# Altium PCB STM32F4xx.PcbDoc
Units mil, origin at the board's own origin, x right, y up, seen from the top; angles counter-clockwise.
Board outline 1112.41 x 2500 mil, 4 copper layers (Top Layer, Ground Layer, Power Layer, Bottom Layer), stack 62.631 mil thick; 47 components, 31 nets, 206 pads, 61 vias.
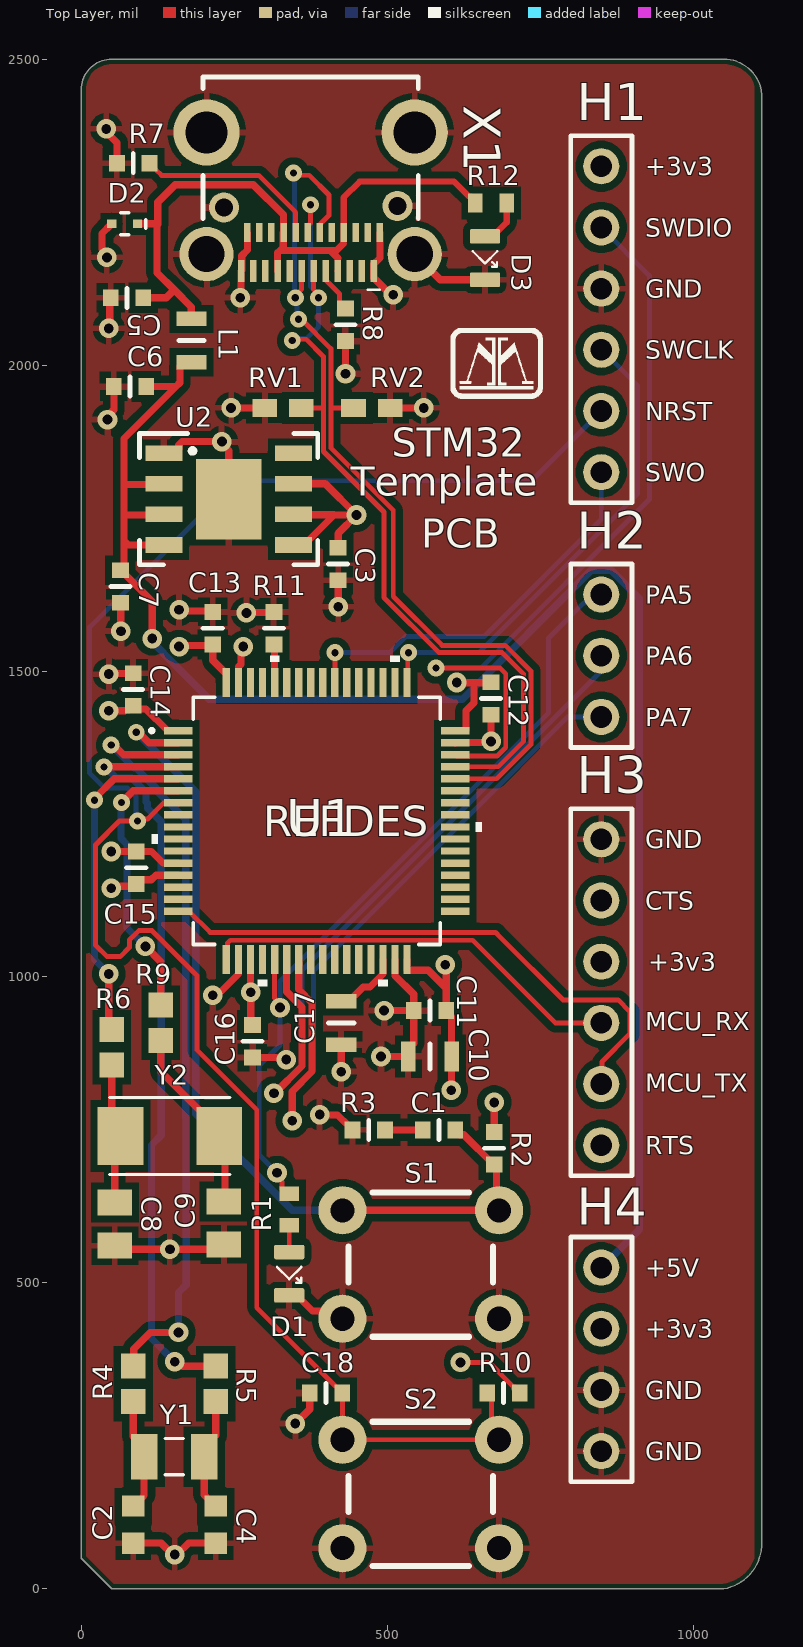
[diagram p0: Top Layer view]
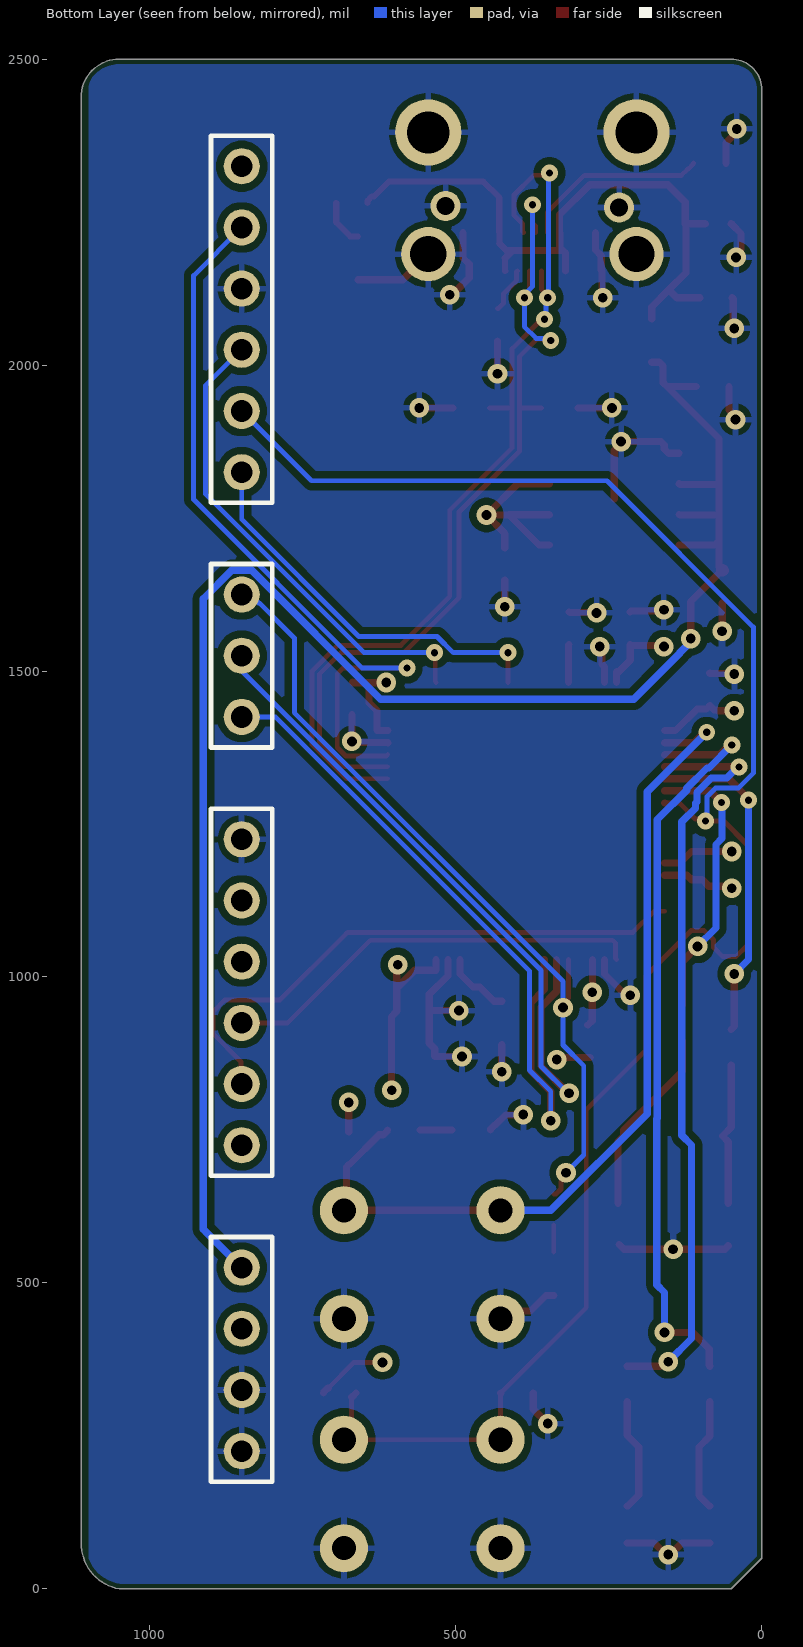
[diagram p1: Bottom Layer view, seen from below]
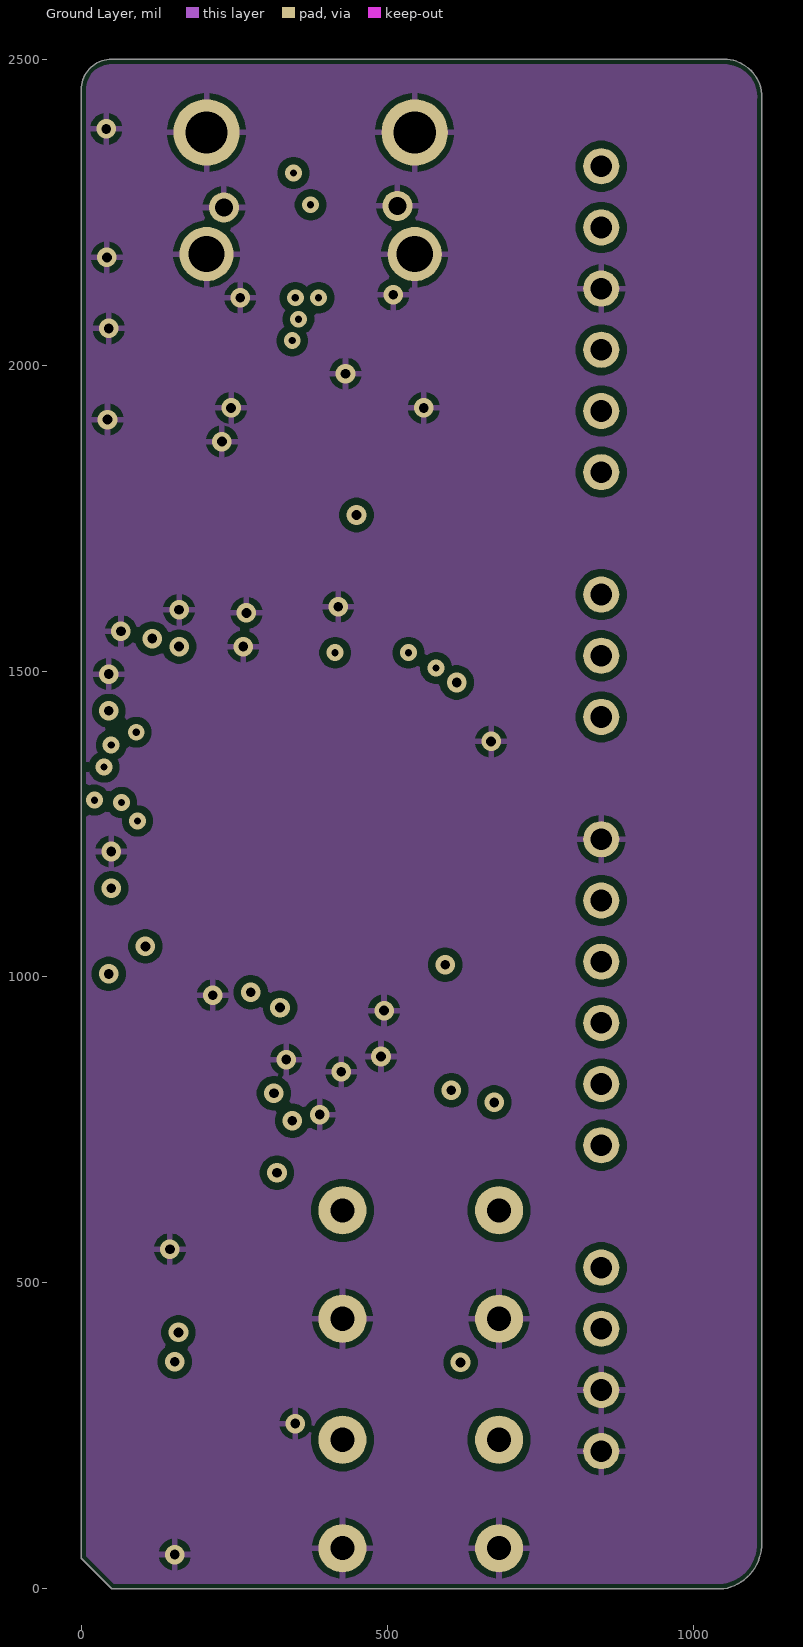
[diagram p2: Ground Layer]
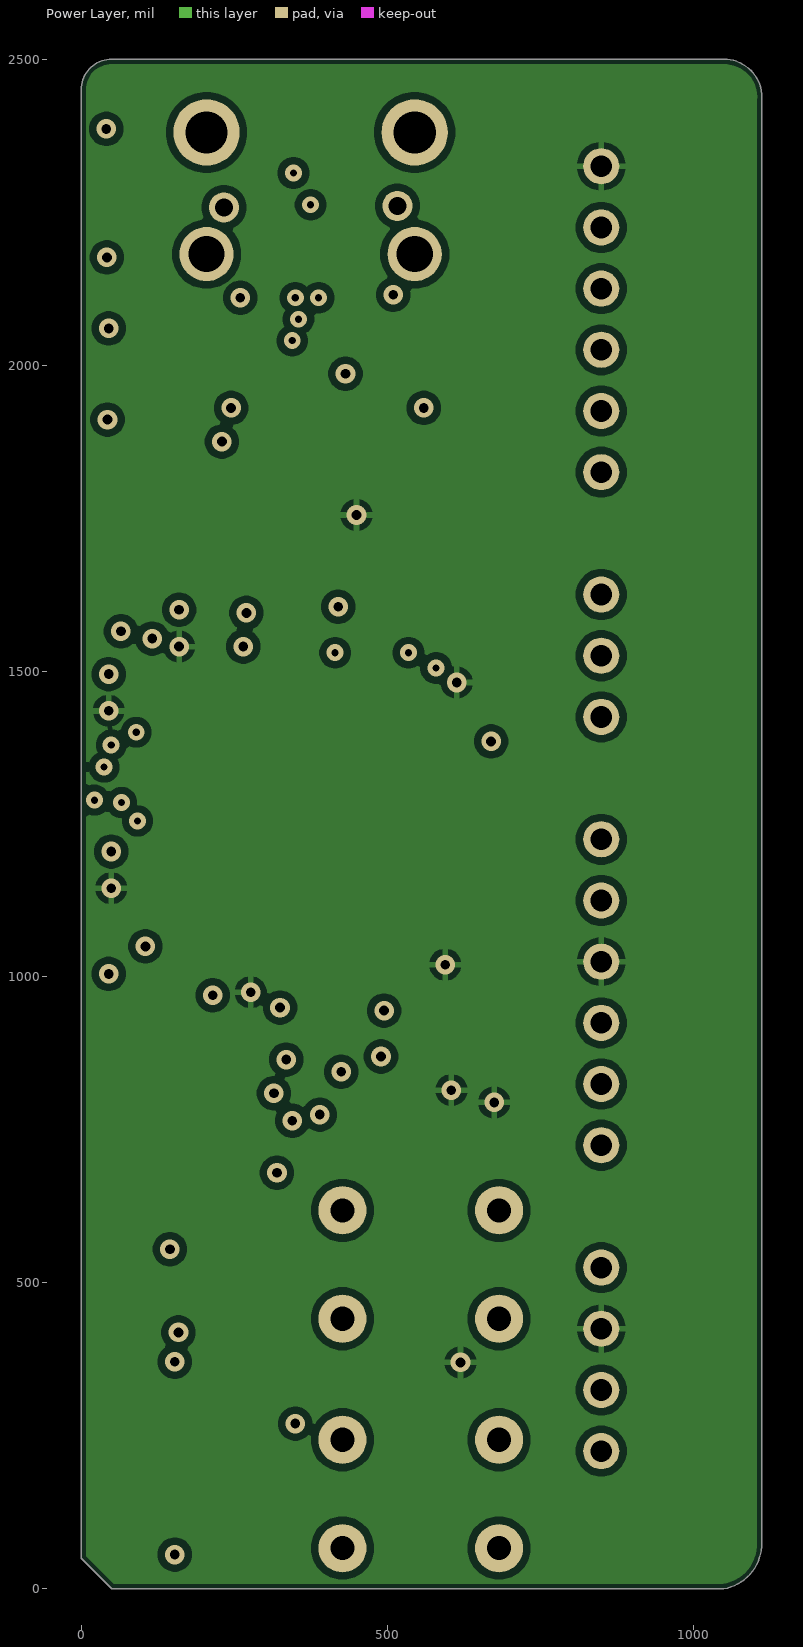
[diagram p3: Power Layer]
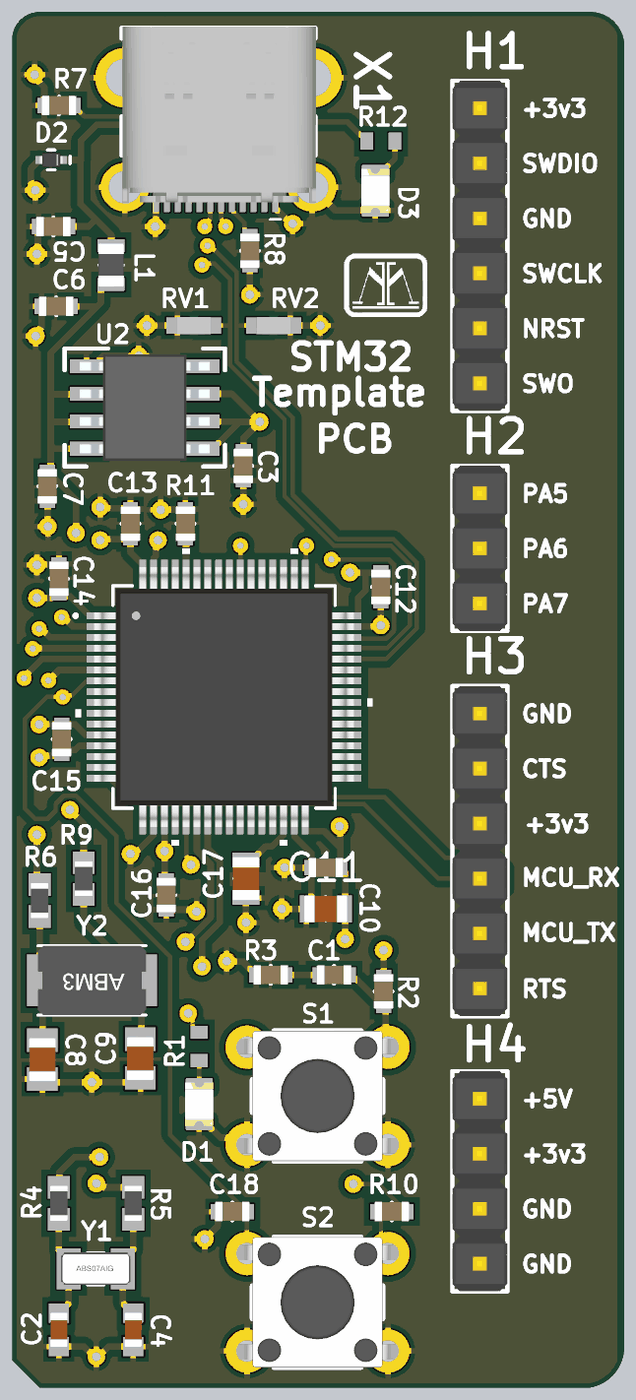
[diagram p4: 3D render of the assembled board from above, using the file's embedded part models]

## Layer stack, top to bottom
Top Solder: solder mask 0.4, Solder Resist, Dk 3.8
Top Layer: signal copper 1.378
Dielectric 2: prepreg 8.2839, 7628*1, Dk 4.4
Ground Layer: signal copper 0.689
Dielectric 1: dielectric 41.9291, FR-4, Dk 4.8
Power Layer: signal copper 0.689
Dielectric 3: prepreg 8.2839, 7628*1, Dk 4.4
Bottom Layer: signal copper 1.378
Bottom Solder: solder mask 0.4, Solder Resist, Dk 3.8

## Board outline
0,50 50,0 1050,0 ccw(c1037.51,73.72) 1112.27,75 1112.27,2432.22 ccw(c1050.06,2437.56) 1050,2500 50,2500 ccw(c50,2450) 0,2450

## Design rules (kind name [scope] priority, off if disabled: settings)
BoardOutlineClearance [All] p1: gap=7.87 ignorepadtopadclearanceinfootprint=FALSE
Clearance "inPolygon Clearance" [InPolygon] p1: gap=11.81 ignorepadtopadclearanceinfootprint=TRUE // this rule ensures that every net within a polygon of a different net has a set clearance from the poly
Clearance "Different Diff Pair" [All] p2: gap=7.87 ignorepadtopadclearanceinfootprint=TRUE
Clearance "Same Diff Pair" [All] p3: gap=3.94 ignorepadtopadclearanceinfootprint=TRUE
Clearance "Different Nets" [not InAnyDifferentialPair] p4: gap=11.81 ignorepadtopadclearanceinfootprint=TRUE except(3.94: Arc-SMDPad Arc-THPad Arc-Via Arc-Text Track-SMDPad Track-THPad Track-Via Track-Text SMDPad-Text THPad-Text Via-Text Fill-Text Poly-Text Region-Text Text-Text; 4.72: Arc-Arc Arc-Track Track-Track; 5.91: SMDPad-SMDPad SMDPad-THPad SMDPad-Via THPad-THPad THPad-Via Via-Via; 7.87: Arc-Hole Track-Hole SMDPad-Hole THPad-Hole Via-Hole Fill-Hole Poly-Hole Region-Hole Text-Hole)
Clearance "Same Net" [not InAnyDifferentialPair] p5: gap=0 ignorepadtopadclearanceinfootprint=TRUE except(3.94: THPad-Via; 7.09: Arc-Arc Arc-Track Track-Track)
ComponentClearance [All] p1: gap=4 collisioncheckmode=3 verticalgap=4 showdistances=TRUE
DiffPairsRouting "Ethernet Routing" [InDifferentialPairClass('Ethernet_Pairs')] p1: maxlimit=9.84 minlimit=7.87 mostfreqgap=9.84 toplayer_maxgap=7.87 toplayer_prefgap=7.87 toplayer_minwidth=9.84 toplayer_maxwidth=9.84 toplayer_prefwidth=9.84 midlayer1_mingap=9.84 midlayer1_minwidth=7.48 midlayer1_maxwidth=7.48 midlayer1_prefwidth=7.48 midlayer2_mingap=9.84 midlayer2_minwidth=7.48 midlayer2_maxwidth=7.48 midlayer2_prefwidth=7.48 bottomlayer_maxgap=7.87 bottomlayer_prefgap=7.87 bottomlayer_minwidth=9.84 bottomlayer_maxwidth=9.84 bottomlayer_prefwidth=9.84 impedanceprofiledriven=TRUE maxuncoupledlength=500
DiffPairsRouting "USB Routing" [InDifferentialPairClass('USB_Pairs')] p2: maxlimit=11.45 minlimit=4.99 mostfreqgap=11.45 toplayer_maxgap=4.99 toplayer_prefgap=4.99 toplayer_minwidth=9.07 toplayer_maxwidth=9.07 toplayer_prefwidth=9.07 midlayer1_mingap=11.45 midlayer1_minwidth=9.84 midlayer1_maxwidth=9.84 midlayer1_prefwidth=9.84 midlayer2_mingap=11.45 midlayer2_minwidth=9.84 midlayer2_maxwidth=9.84 midlayer2_prefwidth=9.84 bottomlayer_maxgap=4.99 bottomlayer_prefgap=4.99 bottomlayer_minwidth=9.07 bottomlayer_maxwidth=9.07 bottomlayer_prefwidth=9.07 impedanceprofiledriven=TRUE maxuncoupledlength=500
DiffPairsRouting "CAN Routing" [InDifferentialPairClass('CAN_Pairs')] p3: maxlimit=35.69 minlimit=19.68 mostfreqgap=35.69 toplayer_maxgap=19.68 toplayer_prefgap=19.68 toplayer_minwidth=7.93 toplayer_maxwidth=7.93 toplayer_prefwidth=7.93 midlayer1_mingap=35.69 midlayer1_minwidth=6.1 midlayer1_maxwidth=6.1 midlayer1_prefwidth=6.1 midlayer2_mingap=35.69 midlayer2_minwidth=6.1 midlayer2_maxwidth=6.1 midlayer2_prefwidth=6.1 bottomlayer_maxgap=19.68 bottomlayer_prefgap=19.68 bottomlayer_minwidth=7.93 bottomlayer_maxwidth=7.93 bottomlayer_prefwidth=7.93 impedanceprofiledriven=TRUE maxuncoupledlength=500
Height [All] p1: minheight=0 maxheight=71497.94 prefheight=500
HoleSize [All] p1: absolutevalues=TRUE maxlimit=248.03 minlimit=11.81 maxpercent=80.000 minpercent=20.000
HoleToHoleClearance [All] p1: gap=9.84 allowstackedmicrovias=FALSE
Length [All] p1: maxlimit=1709.92 minlimit=0 usedelayunits=TRUE mindelay=0.000000 maxdelay=10000.000000
MatchedLengths "Diff Pair Matched Delays" [InDifferentialPairClass('Ethernet_Pairs') or InDifferentialPairClass('USB_Pairs') or InDifferentialPairClass('CAN_Pairs')] p1: tolerance=196.85 checknetsindiffpair=TRUE checkdiffpairvsdiffpair=FALSE checkxsignals=FALSE checkothers=FALSE usedelayunits=TRUE delaytolerance=100.000000
MinimumAnnularRing [All] p1: minimumring=7.87
MinimumSolderMaskSliver [All] p1: minsoldermaskwidth=0
PlaneClearance "Supply Net Clearance" [InNetClass('Supply_Nets')] p1: clearance=19.68
PlaneClearance "All Nets" [All] p2: clearance=11.81
PolygonConnect "Supply Nets" [InNetClass('Supply_Nets')] p1: connectstyle=Direct reliefconductorwidth=11.81 reliefentries=4 polygonreliefangle="90 Angle" airgapwidth=10
PolygonConnect General [All] p2: connectstyle=Relief reliefconductorwidth=10 reliefentries=4 polygonreliefangle="90 Angle" airgapwidth=10
RoutingVias [All] p1: holewidth=7.87 width=13.78 viastyle="Through Hole" minholewidth=5.91 minwidth=11.81 maxholewidth=248.03 maxwidth=257.87
SilkToSilkClearance [All] p1: silktosilkclearance=0
SilkToSolderMaskClearance [All] p1: minsilkscreentomaskgap=0 clearancetoexposedcopper=TRUE
SolderMaskExpansion [All] p1: expansion=2.95 istentingtop=FALSE
SupplyNets "Schematic Supply Nets_4" [InNet('+VUSB')] p1: voltage=0.000
SupplyNets "Schematic Supply Nets_2" [InNet('+5')] p2: voltage=0.000
SupplyNets "Schematic Supply Nets" [InNet('+3v3')] p3: voltage=0.000
SupplyNets "Schematic Supply Nets_3" [InNet('GND')] p4: voltage=0.000
UnRoutedNet [All] p1: checkbadconnections=TRUE
ViasUnderSMD [All] p1: allowed=TRUE
Width "nRF Width" [InNetClass('nRF Signal')] p1: maxlimit=14.94 minlimit=10.37 preferedwidth=14.94 toplayer_minwidth=14.94 midlayer1_maxwidth=10.37 midlayer1_prefwidth=10.37 midlayer2_maxwidth=10.37 midlayer2_prefwidth=10.37 bottomlayer_minwidth=14.94 impedanceprofiledriven=TRUE impedanceprofileid={A3B527BC-29A3-460A-A085-F9127CF7B707} impedanceprofilevalue=50.000000 minimp=50.000000 maximp=50.000000 favimp=50.000000 checkconnectedcopper=TRUE
Width [All] p2: maxlimit=3937.01 minlimit=3.94 preferedwidth=11.81
20 further rules are at their usual default settings.

## Classes and differential pairs
differential pair class DIFF_USB: USB_D
differential pair USB_D: +USB_D_P -USB_D_N

## Components (designator, comment, footprint, x,y, rotation, side; value= is the part's Value field where it differs from the comment)
C1 "[Cap] 0603 0.1uF 10% 16V" "[Cap] SMD 0603" 585,750 r0 top
C2 "8pF" "[Cap] 0603 8pF ±0.1pF 50V" 85,105 r270 top
C3 "[Cap] 0603 10uF 10% 10V" "[Cap] SMD 0603" 420,1675 r270 top
C4 "8pF" "[Cap] 0603 8pF ±0.1pF 50V" 220,105 r270 top
C5 "[Cap] 0603 0.1uF 10% 16V" "[Cap] SMD 0603" 75,2110 r180 top
C6 "[Cap] 0603 0.1uF 10% 16V" "[Cap] SMD 0603" 80,1965 r180 top
C7 "[Cap] 0603 10uF 10% 10V" "[Cap] SMD 0603" 64,1638 r90 top
C8 "[Cap] 0805 18pF ±5% 250V" "[Cap] 0805 ±5% 250V" 55,596 r270 top
C9 "[Cap] 0805 18pF ±5% 250V" "[Cap] 0805 ±5% 250V" 233,598 r270 top
C10 "[Cap] 0805 4.7uF 10% 50V" "[Cap] SMD 0805" 570,870 r0 top
C11 "[Cap] 0603 0.1uF 10% 16V" "[Cap] SMD 0603" 570,945 r0 top
C12 "[Cap] 0603 0.1uF 10% 16V" "[Cap] SMD 0603" 670,1455 r270 top
C13 "[Cap] 0603 0.1uF 10% 16V" "[Cap] SMD 0603" 215,1570 r90 top
C14 "[Cap] 0603 0.1uF 10% 16V" "[Cap] SMD 0603" 85,1470 r90 top
C15 "[Cap] 0603 0.1uF 10% 16V" "[Cap] SMD 0603" 90,1178.43 r90 top
C16 "[Cap] 0603 0.1uF 10% 16V" "[Cap] SMD 0603" 280,895 r90 top
C17 "[Cap] 0805 4.7uF 10% 50V" "[Cap] SMD 0805" 425,925 r90 top
C18 "[Cap] 0603 0.1uF 10% 16V" "[Cap] SMD 0603" 400,320 r180 top
D1 "[LED] SMD 0805 Green" "[LED] SMD 0805" 340,515 r270 top
D2 "Cathode side marked by line" "[TVS] UNIDIRECTIONAL FOR 5V ESD" 71,2231 r180 top
D3 "[LED] SMD 0805 Red" "[LED] SMD 0805" 660,2175 r270 top
H1 "SWD Header" "[Header] 1x6 Male STM32 SWD" 850,2075 r270 top
H2 "GPIO Header" "[Header] 1x3 Male GPIO" 849.99,1525 r270 top
H3 "UART Header" "[Header] 1x6 Male STM32 UART" 850,975 r270 top
H4 "1x4 Header" "[Header] 1x4 Male Power" 849.99,375 r270 top
L1 "652-MH2029-300Y" "[Ferrite] SMD 0805" 180,2040 r270 top
R1 "RC0603JR-13470RL" RESC1608X55X25LL10T15 340,620 r270 top
R2 "[10k] SMD 0603 1% 1/8W" "[Res] SMD 0603" 675,720 r270 top
R3 "[100] SMD 0603 1% 1/10W" "[Res] SMD 0603" 470,750 r0 top
R4 "[0] SMD 0603 5% 1/10W" "[0] SMD 0603 5% 1/10W" 85,335 r270 top
R5 "[0] SMD 0603 5% 1/10W" "[0] SMD 0603 5% 1/10W" 220,335 r270 top
R6 "[0] SMD 0603 5% 1/10W" "[0] SMD 0603 5% 1/10W" 50,885 r270 top
R7 "[5.1k] SMD 0603 1% 1/10W" "[Res] SMD 0603" 85,2330 r180 top
R8 "[5.1k] SMD 0603 1% 1/10W" "[Res] SMD 0603" 432,2066 r270 top
R9 "[0] SMD 0603 5% 1/10W" "[0] SMD 0603 5% 1/10W" 130,925 r270 top
R10 "[10k] SMD 0603 1% 1/8W" "[Res] SMD 0603" 690,320 r0 top
R11 "[10k] SMD 0603 1% 1/8W" "[Res] SMD 0603" 315,1570 r90 top
R12 "RC0603JR-13470RL" RESC1608X55X25LL10T15 670,2265 r0 top
RV1 "[ESD] SMD Varistor for USB 3.3V lines" "[ESD] SMD Varistor for USB 3.3V lines" 330,1930 r180 top
RV2 "[ESD] SMD Varistor for USB 3.3V lines" "[ESD] SMD Varistor for USB 3.3V lines" 475,1930 r0 top
S1 "Standard pushbutton" "[SPST] Pushbutton" 555,530 r180 top
S2 "Standard pushbutton" "[SPST] Pushbutton" 555,155 r0 top
U1 "STM32F446RET6" STM32F446RET6 385,1255 r0 top
U2 "3V3 1.5A" "[Linear] 3V3 1.5A" 241,1781 r0 top
X1 "USB-C" "[USB] USB-C Right-Angle" 375,2310 r180 top
Y1 "ABS07-32.768KHZ" ABS07-32.768KHZ 152,216 r0 top
Y2 "ABM3-8.000MHZ" ABM3-8.000MHZ 145,740 r180 top

## Footprints (in the part's own frame and the unit in brackets; to place one, negate y for a bottom-side part, rotate by r counter-clockwise, add the part's x,y. Pads: shape width x height; smd on the part's side, far side on the other; paste and mask are expansions set on the pad)
"[0] SMD 0603 5% 1/10W" [mm]
  rect 1.04x1.02 smd: 1(-0.735,0) 2(0.735,0)
  body extent -0.8,-0.4 0.8,0.4, height 0.55
"[Cap] 0603 8pF ±0.1pF 50V" [mm]
  rect 0.89x0.93 smd paste+0 mask+0.102: 1(-0.77,0) 2(0.77,0)
  body extent -0.8,-0.4 0.8,0.4, height 0.9
"[Cap] 0805 ±5% 250V" [mm]
  rect 1.08x1.42 smd paste+0 mask+0.102: 1(-0.895,0) 2(0.895,0)
  body extent -1,-0.63 1,0.63, height 1
"[Cap] SMD 0603" [mm]
  rect 0.65x0.7 smd: 1(-0.675,0) 2(0.675,0)
  silkscreen extent 0,-0.4 0,0.4, body extent -0.8,-0.45 0.8,0.45, height 0.8
"[Cap] SMD 0805" [mm]
  rect 0.6x1.25 smd: 1(-0.9,0) 2(0.9,0)
  silkscreen extent 0,-0.53 0,0.53, body extent -1,-0.63 1,0.63, height 1
"[ESD] SMD Varistor for USB 3.3V lines" [mm]
  rect 1.02x0.76 smd: 1(-0.76,0) 2(0.76,0)
  body extent -0.8,-0.4 0.8,0.4, height 0.45
"[Ferrite] SMD 0805" [mm]
  rect 0.6x1.25 smd: 1(-0.9,0) 2(0.9,0)
  silkscreen extent 0,-0.53 0,0.53, body extent -1,-0.6 1,0.6, height 1.1
"[Header] 1x3 Male GPIO" [mm]
  round 1.5 hole 0.9: 1(-2.54,0) 2(0,0) 3(2.54,0)
  silkscreen extent -3.81,-1.27 3.81,1.27, body extent -3.81,-1.27 3.81,1.27, height 9.5
"[Header] 1x4 Male Power" [mm] "2.54mm pitch"
  round 1.5 hole 0.9: 1(-3.81,0) 2(-1.27,0) 3(1.27,0) 4(3.81,0)
  silkscreen extent -5.08,-1.27 5.08,1.27, body extent -5.08,-1.27 5.08,1.27, height 9.5
"[Header] 1x6 Male STM32 SWD" [mm]
  round 1.5 hole 0.9: 1(-6.35,0) 2(-3.81,0) 3(-1.27,0) 4(1.27,0) 5(3.81,0) 6(6.35,0)
  silkscreen extent -7.62,-1.27 7.62,1.27, body extent -7.62,-1.27 7.62,1.27, height 9.5
"[Header] 1x6 Male STM32 UART" [mm]
  round 1.5 hole 0.9: 1(-6.35,0) 2(-3.81,0) 3(-1.27,0) 4(1.27,0) 5(3.81,0) 6(6.35,0)
  silkscreen extent -7.62,-1.27 7.62,1.27, body extent -7.62,-1.27 7.62,1.27, height 9.5
"[LED] SMD 0805" [mm]
  rrect20% 0.6x1.25 smd: 1(-0.9,0) 2(0.9,0)
  silkscreen extent -0.28,-0.51 0.37,0.51, body extent -1,-0.65 1,0.65, height 0.8
"[Linear] 3V3 1.5A" [mm]
  rect 1.525x0.65 smd: 1(-2.688,1.905) 2(-2.688,0.635) 3(-2.688,-0.635) 4(-2.688,-1.905) 5(2.688,-1.905) 6(2.688,-0.635) 7(2.688,0.635) 8(2.688,1.905)
  rect 2.71x3.35 smd: 9(0,0)
  silkscreen extent -3.7,-2.73 3.7,2.73, body extent -3,-2.45 3,2.45, height 1.5
"[Res] SMD 0603" [mm]
  rect 0.65x0.7 smd: 1(-0.675,0) 2(0.675,0)
  silkscreen extent 0,-0.4 0,0.4, body extent -0.8,-0.45 0.8,0.45, height 0.8
"[SPST] Pushbutton" [mm] "(Regular pushbutton)"
  round 2 hole 1: 1(-3.25,2.25) 1(3.25,2.25) 2(-3.25,-2.25) 2(3.25,-2.25)
  silkscreen extent -3,-3 3,3, body extent -3.85,-3 3.85,3, height 4.95
"[TVS] UNIDIRECTIONAL FOR 5V ESD" [mil]
  rect 15x14 smd paste+0 mask+0: 1(-21.17,0) 2(21.17,0)
  silkscreen extent -34,-18 7,18, body extent -21,-13 21,13, height 16
"[USB] USB-C Right-Angle" [mm]
  rect 0.27x0.9 smd: A1(-2.625,3.965) A2(-2.125,3.965) A3(-1.625,3.965) A4(-1.125,3.965) A5(-0.625,3.965) A6(-0.125,3.965) A7(0.375,3.965) A8(0.875,3.965) A9(1.375,3.965) A10(1.875,3.965) A11(2.375,3.965) A12(2.875,3.965)
  rect 0.27x0.8 smd: B1(2.625,2.365) B2(2.125,2.365) B3(1.625,2.365) B4(1.125,2.365) B5(0.625,2.365) B6(0.125,2.365) B7(-0.375,2.365) B8(-0.875,2.365) B9(-1.375,2.365) B10(-1.875,2.365) B11(-2.375,2.365) B12(-2.875,2.365)
  round 2.25 hole 1.5: MH(-4.32,3.265) MH(4.32,3.265)
  round 2.75 hole 1.75: MH(-4.32,-1.785) MH(4.32,-1.785)
  round 1.25 hole 0.75: MH(-3.6,1.265) MH(3.6,1.33)
  silkscreen extent -4.47,-4.09 4.47,4.75, body extent -4.51,-4.16 4.43,4.01, height 2.92
ABM3-8.000MHZ [mm]
  rect 1.9x2.4 smd: 1(-2.05,0) 2(2.05,0)
  silkscreen extent -2.5,-1.6 2.5,1.6, body extent -2.5,-1.6 2.5,1.6, height 1.3
ABS07-32.768KHZ [mm]
  rect 1.1x1.9 smd: 1(-1.25,0) 2(1.25,0)
  silkscreen extent -0.38,-0.75 0.38,0.75, body extent -1.6,-0.75 1.6,0.75, height 0.9
RESC1608X55X25LL10T15 [mm] "Chip Resistor, 2-Leads, Body 1.60x0.80mm, IPC High Density"
  rect 0.6x0.8 smd: 1(-0.65,0) 2(0.65,0)
  body extent -0.85,-0.45 0.85,0.45, height 0.55
STM32F446RET6 [mil]
  rect 47x12 smd paste+0 mask+0: 1(-226.38,147.64) 2(-226.38,127.95) 3(-226.38,108.27) 4(-226.38,88.58) 5(-226.38,68.9) 6(-226.38,49.21) 7(-226.38,29.53) 8(-226.38,9.84) 9(-226.38,-9.84) 10(-226.38,-29.53) 11(-226.38,-49.21) 12(-226.38,-68.9) 13(-226.38,-88.58) 14(-226.38,-108.27) 15(-226.38,-127.95) 16(-226.38,-147.64) 33(226.38,-147.64) 34(226.38,-127.95) 35(226.38,-108.27) 36(226.38,-88.58) 37(226.38,-68.9) 38(226.38,-49.21) 39(226.38,-29.53) 40(226.38,-9.84) 41(226.38,9.84) 42(226.38,29.53) 43(226.38,49.21) 44(226.38,68.9) 45(226.38,88.58) 46(226.38,108.27) 47(226.38,127.95) 48(226.38,147.64)
  rect 12x47 smd paste+0 mask+0: 17(-147.64,-226.38) 18(-127.95,-226.38) 19(-108.27,-226.38) 20(-88.58,-226.38) 21(-68.9,-226.38) 22(-49.21,-226.38) 23(-29.53,-226.38) 24(-9.84,-226.38) 25(9.84,-226.38) 26(29.53,-226.38) 27(49.21,-226.38) 28(68.9,-226.38) 29(88.58,-226.38) 30(108.27,-226.38) 31(127.95,-226.38) 32(147.64,-226.38) 49(147.64,226.38) 50(127.95,226.38) 51(108.27,226.38) 52(88.58,226.38) 53(68.9,226.38) 54(49.21,226.38) 55(29.53,226.38) 56(9.84,226.38) 57(-9.84,226.38) 58(-29.53,226.38) 59(-49.21,226.38) 60(-68.9,226.38) 61(-88.58,226.38) 62(-108.27,226.38) 63(-127.95,226.38) 64(-147.64,226.38)
  silkscreen extent -273,-270 270,270, body extent -236,-236 236,236, height 63

## Part data
C1 C5 C6 C11 C12 C13 C14 C15 C16 C18: "CC0603KRX7R7BB104", Capacitance=100nF, Max Voltage=16V, Size Package=0603, Supplier Part Number 1=311-1088-6-ND, Tolerance=10%, Supplier 1=DigiKey
C2 C4: library part "[Cap] 0603 8pF ±0.1pF 50V", "GRM1555C1H8R0BA01D", Manufacturer_Name=Murata, Capacitance=8pF, Copyright="Copyright (C) 2026 Ultra Librarian. All rights reserved.", Digi-Key_Part_Number_1=490-8230-1-ND, Digi-Key_Part_Number_2=490-8230-2-ND, Digi-Key_Part_Number_3=490-8230-6-ND, Manufacturer_Part_Number=GRM1555C1H8R0BA01D, Siz=0603, Supplier 1="Arrow Electronics"
C3 C7: "CL10A106KP8NNNC", Capacitance=10uF, Max Voltage=10V, Size Package=0603, Supplier Part Number 1=1276-1192-6-ND, Tolerance=10%, Supplier 1=DigiKey
C8 C9: "GQM2195C2E180JB12D", Capacitance=18pF, Package="2012 Murata", Check_prices=https://www.snapeda.com/parts/GQM2195C2E270JB12D/Murata/view-part/?ref=eda, MF=Murata, MP=GQM2195C2E270JB12D, Size=0805, SnapEDA_Link=https://www.snapeda.com/parts/GQM2195C2E270JB12D/Murata/view-part/?ref=snap, Supplier 1="Arrow Electronics"
C10 C17: "GRT21BR61H475KE13L", Capacitance=4.7uF, Max Voltage=50V, Size Package=0805, Supplier Part Number 1=490-12394-1-ND, Tolerance=10%, Supplier 1=DigiKey
D1: "LG R971-KN-1-0-20-R18", Color=Green, Size Package=0805, Supplier Part Number 1=475-LGR971-KN-1CT-ND, Supplier 1=DigiKey
D2: library part "[TVS] Unidirectional for 5V ESD", "D5V0F1U2S9-7", Manufacturer_Name="Diodes Inc", Reverse Breakdown Voltage=5.5V, Size Package=0603, Copyright="Copyright (C) 2025 Ultra Librarian. All rights reserved.", Manufacturer_Part_Number=D5V0F1U2S9-7, Supplier 1=Avnet, Supplier Part Number 1=D5V0F1U2S9-7
D3: "LS R976-NR-1-0-20-R18", Color=Red, Size Package=0805, Supplier Part Number 1=475-LSR976-NR-1CT-ND, Supplier 1=DigiKey
H1: library part "[Header] 1x6 Male STM32 SWD", "2.54mm pitch"
H2: library part "[Header] 1x3 Male GPIO", "2.54mm pitch"
H3: library part "[Header] 1x6 Male STM32 UART", "2.54mm pitch"
H4: library part "[Header] 1x4 Male Power", "2.54mm pitch"
L1: library part "[Ferrite] SMD 0805 3A 30ohm", Res @ Freq="30 @ 100MHz", Size Package=0805, Supplier Part Number 1=MH2029-300YCT-ND, Supplier 1=DigiKey
R1 R12: library part CMP-2000-04326-1, Manufacturer=Yageo, Resistance=470, Size Package=0603, Part Number=RC0603JR-13470RL
R2 R10 R11: "RC0805JR-0710KL", Resistance=10k, Size Package=0805, Supplier Part Number 1=311-10KARCT-ND, Tolerance=5%, Supplier 1=DigiKey, Wattage=1/8W
R3: "RC0603FR-07100RL", Resistance=100, Size Package=0603, Supplier Part Number 1=311-100HRDKR-ND, Tolerance=1%, Supplier 1=DigiKey, Wattage=1/10W
R4 R5 R6 R9: "RC0603JR-070RL", Package="0603 Yageo", Resistance=0, Size Package=0603, Tolerance=5%, Check_prices=https://www.snapeda.com/parts/RC0603JR-070RL/Yageo/view-part/?ref=eda, MF=Yageo, MP=RC0603JR-070RL, SnapEDA_Link=https://www.snapeda.com/parts/RC0603JR-070RL/Yageo/view-part/?ref=snap, Supplier 1=Avnet, Supplier Part Number 1=RC0603JR-070RL, Wattage=1/10W
R7 R8: "RC0603FR-075K1L", Resistance=5.1k, Size Package=0603, Supplier Part Number 1=311-5.10KHRCT-ND, Tolerance=1%, Supplier 1=DigiKey, Wattage=1/10W
RV1 RV2: "Varistor 1 Circuit Surface Mount, MLCV 0603 (1608 Metric) CG0603MLU-05E", Package="0603 Bourns", Check_prices=https://www.snapeda.com/parts/CG0603MLU-05E/Bourns/view-part/?ref=eda, MF=Bourns, MP=CG0603MLU-05E, SnapEDA_Link=https://www.snapeda.com/parts/CG0603MLU-05E/Bourns/view-part/?ref=snap, Supplier 1=Avnet
S1 S2: library part "[SPST] Pushbutton", Supplier Part Number 1=450-1650-ND, Supplier 1=DigiKey
U1: "High-performance foundation line, Arm Cortex-M4 core with DSP and FPU, 512 Kbytes of Flash memory, 180 MHz CPU, ART Accelerator, Dual QSPI", Manufacturer_Name=STMicroelectronics, Supplier Part Number 1=52Y1122, Copyright="Copyright (C) 2025 Ultra Librarian. All rights reserved.", Manufacturer_Part_Number=STM32F446RET6, RefDes=RefDes, Supplier 1=Avnet, Type=Type
U2: library part "[Linear] 3V3 1.5A", "AP7362A-33SP-13", Supplier Part Number 1=AP7362A-33SP-13DICT-ND, Supplier 1=DigiKey
X1: library part "[USB] Type-C Right-Angle", Supplier Part Number 1=670-3104-1-ND, Supplier 1=DigiKey
Y1: "ABS07-32.768KHZ-9-T, 32.768 kHz Â±20ppm Crystal 9pF 70 kOhms 2-SMD, No Lead", Package="SMD-2 Abracon LLC", Supplier Part Number 1=ABS07-32.768KHZ-T, Check_prices=https://www.snapeda.com/parts/ABS07-32.768KHZ-9-T/Abracon/view-part/?ref=eda, MF=Abracon, MP=ABS07-32.768KHZ-9-T, SnapEDA_Link=https://www.snapeda.com/parts/ABS07-32.768KHZ-9-T/Abracon/view-part/?ref=snap, Supplier 1="Arrow Electronics"
Y2: "ABM3-8.000MHZ-D2Y-T, 8 MHz Â±20ppm Crystal 18pF 140 Ohms 2-SMD, No Lead", Package="SMD-2 Abracon", Supplier Part Number 1=ABM3-8.000MHZ-D2Y-T, Availability="In Stock", Check_prices=https://www.snapeda.com/parts/ABM3-8.000MHZ-D2Y-T/Abracon+LLC/view-part/?ref=eda, MF=Abracon, MP=ABM3-8.000MHZ-D2Y-T, Price=None, Purchase-URL=https://pricing.snapeda.com/search/part/ABM3-8.000MHZ-D2Y-T/?ref=eda, SnapEDA_Link=https://www.snapeda.com/parts/ABM3-8.000MHZ-D2Y-T/Abracon+LLC/view-part/?ref=snap, Supplier 1="Arrow Electronics"

## Via types
v1: diameter 32, hole 16, Top Layer to Bottom Layer, 46 vias
v2: diameter 27.56, hole 11.81, Top Layer to Bottom Layer, 15 vias

## Nets (pads, with @x,y where several pads share a name; then routed paths per layer and width w, separated by ;. In a path a pad name is that pad's centre, name@x,y a point inside that pad or via, vN(x,y) a via of type N, cw(c..) or ccw(c..) an arc to the next point about the centre after c; other vN are vias at no path point)
+3v3: C3.1 C10.2 C11.2 C12.1 C13.1 C14.1 C15.1 C16.2 H1.1 H3.3 H4.2 R2.1 R10.2 U1.1 U1.13 U1.19 U1.32 U1.48 U1.64 U2.5 U2.6 U2.7 | length 1499.6
  Top Layer w8: v1(620,370) 666.57,370 R10.2@708.7,327.87
  Top Layer w11.81: v1(45,1435) 71.59,1435 73.13,1436.54 78.11,1436.54 C14.1 90.36,1438.07 105.69,1438.07 141.03,1402.73 158.53,1402.73 U1.1 ; v1(49.16,1145) 52.58,1148.43 86.57,1148.43 96.89,1158.74 114.45,1158.74 122.13,1166.42 U1.13 ; v1(160,1540) 161.71,1541.71 213.29,1541.71 C13.1 215,1517.64 233.67,1498.97 237.27,1498.97 237.36,1498.88 U1.64 ; U1.19 276.83,1028.53 276.83,975.17 v1(277,975) 277,934 277.13,933.87 277.13,928.46 284.02,921.57 C16.2@285,921.57 ; U2.5 364.05,1706 413.05,1755 v1(450,1755) ; U2.6 347.33,1755.5 413.05,1755.5 ; U2.7 399,1806 v1(450,1755) ; C3.1 420,1725 v1(450,1755) ; U1.32 532.64,1011.12 532.73,1011.03 567.26,1011.03 596.57,981.71 ; v1(595,1020) 596.57,1018.43 596.57,981.71 ; v1(605,815) 605.22,815.22 605.22,869.78 C10.2 605.43,935.16 596.57,944.02 C11.2 596.57,981.71 ; U1.48 628.88,1402.64 628.97,1402.73 628.97,1435.24 642.01,1448.28 642.01,1480.79 ; v1(613.75,1481.25) 614.21,1480.79 642.01,1480.79 ; C12.1@669.02,1481.57 668.23,1480.79 642.01,1480.79 ; R2.1 v1(675,795) ; R10.2@708.7,327.87 709.68,327.87 716.57,320.98 R10.2
+5: C6.1 C7.2 H4.1 L1.2 U2.2 U2.3 U2.4 | length 2843.2
  Top Layer w11.81: C7.2 70,1670.57 70,1712.79 ; C6.1 155,1965 ; U2.4 76.79,1706 70,1712.79 ; U2.3 134.17,1755 70,1755 ; U2.2 134.17,1805 70,1805 ; L1.2 167.2,2004.57 161.3,1998.66 161.3,1971.3 155,1965 ; 70,1712.79 70,1755 ; 70,1755 70,1805 ; 70,1805 70,1880 155,1965
  Top Layer w12: C7.2@64.98,1664.57 116,1613.56 v1(116,1553)
  Top Layer w20: C7.2 C7.2@64.98,1664.57
  Bottom Layer w12: v1(116,1553) 116,1547.99 134.06,1529.93 134.06,1529.26 209.26,1454.06 623.24,1454.06 833.65,1664.47 866.34,1664.47 912.63,1618.17 912.63,587.64 907.04,582.05 H4.1
+VUSB: C5.1 D2.1 L1.1 R12.1 X1.A4 X1.A9 X1.B4 X1.B9 | length 1103.4
  Top Layer w10: 320.87,2183.7 325.43,2188.27 ; 326.5,2187.2 325.43,2188.27 ; 330,2195 330,2192.83 325.43,2188.27 ; X1.B4@330.39,2216.57 X1.B4 ; X1.A4 419.61,2154.21 419.61,2174.61 ; 428.82,2198.82 428.82,2216.57 X1.B9 429.13,2274.13 455,2300 609.41,2300 633.66,2275.75 637.6,2275.75 644.41,2268.94 R12.1
  Top Layer w12: D2.1 124,2231 ; C5.1 139,2110 152,2123 ; L1.1 180,2095 152,2123 ; X1.A9 320.87,2183.7 ; 326.5,2187.2 407.01,2187.2 ; 330,2195 330.39,2195.39 X1.B4@330.39,2216.57 ; X1.B4 330.71,2245.72 281.43,2295 154.01,2295 125,2265.99 125,2230 124,2231 ; 419.61,2174.61 407.01,2187.2 ; 428.82,2198.82 417.2,2187.2 407.01,2187.2 ; 124,2231 124,2151 152,2123
ABM3_IN: C8.1 R6.2 Y2.2 | length 235.6
  Top Layer w11.81: R6.2 50,754.29 Y2.2 55,730.71 C8.1@55,630.24
ABM3_OUT: C9.1 R9.2 Y2.1 | length 309.3
  Top Layer w11.81: R9.2 130,845.55 225.71,749.84 Y2.1 235,730.71 C9.1@235,630.24
ABS07_IN: C2.1 R4.2 Y1.1 | length 185.9
  Top Layer w11.81: C2.1 85.79,135.31 102.79,152.31 Y1.1 102.79,231.75 85,249.54 R4.2
ABS07_OUT: C4.1 R5.2 Y1.2 | length 186.8
  Top Layer w11.81: C4.1 219.21,135.31 201.21,153.31 Y1.2 201.21,231.75 220,250.54 R5.2
GND: C2.2 C3.2 C4.2 C5.2 C6.2 C7.1 C8.2 C9.2 C10.1 C11.1 C12.2 C13.2 C14.2 C15.2 C16.1 C17.1 C18.2 D1.2 D2.2 D3.2 H1.3 H3.1 H4.3 H4.4 R3.1 R7.2 R8.2 R11.2 RV1.2 RV2.2 S1.1 S2.2 U1.12 U1.18 U1.31 U1.47 U1.63 U2.1 U2.9 X1.A1 X1.A12 X1.B1 X1.B12 X1.MH | length 2499.8
  Top Layer w11.81: v1(41,2386) 41,2380.85 58.43,2363.42 R7.2 ; v1(42,2176) 42,2181.46 34,2189.46 34,2215.17 48.24,2229.41 48.24,2229.91 49.33,2231 D2.2 ; v1(43,1911) 43,1916.46 53.43,1926.89 C6.2 ; v1(45,1495) 45.79,1495.79 84.21,1495.79 C14.2 ; v1@46.71,2058.29 v1(45,2060) 46.71,2061.71 46.71,2108.29 C5.2 ; v1(49.16,1205) 115,1205 133.8,1186.2 158.53,1186.2 U1.12 ; C8.2 60.76,555 v1(145,555) 225.24,555 C9.2 ; C7.1 64.5,1610.93 64.5,1565.5 v1(65,1565) ; C2.2 130.68,74.69 149.37,56 v1(153,56) 156.63,56 175.32,74.69 C4.2 ; U2.1 152.4,1856 159.29,1862.89 159.29,1869.46 164.82,1875 v1(230,1875) 230,1870.94 241,1859.94 U2.9 ; v1(160,1600) 161.71,1598.29 213.29,1598.29 C13.2 ; v1(215,970) 218.86,973.86 226.02,973.86 256.95,1004.79 256.95,1028.53 U1.18 ; v1(245,1930) RV1.2 ; U1.63 257.14,1481.47 257.14,1507.14 261.14,1511.14 261.14,1536.14 v1(265,1540) ; v1(260,2110) 261.22,2111.22 261.22,2153.31 262.4,2154.49 262.4,2178.9 271.65,2188.15 X1.B1 ; v1(270,1595) 270.79,1595.79 314.21,1595.79 R11.2 ; C16.1 331.57,868.43 v1(335,865) ; D1.2 352.8,479.56 378.14,454.22 414.24,454.22 S1.1@427.05,441.42 ; v1(350,270) 373.43,293.43 C18.2 ; v1(390,775) 390.57,774.43 418.99,774.43 435.55,757.87 436.54,757.87 443.43,750.98 R3.1 ; v1(420,1605) C3.2 ; v1(425,845) C17.1 ; v1(432,1986) R8.2 ; X1.B12 488.19,2174.96 478.35,2165.12 X1.A1 478.35,2142.68 506.02,2115 v1(510,2115) ; v1(490,870) C10.1 534.57,882.8 543.43,891.65 C11.1 ; v1(495,945) C11.1 ; RV2.2 v1(560,1930) ; U1.31 513.05,1028.53 513.05,1001.95 543.43,971.57 C11.1 ; X1.MH@545.08,2181.46 586.97,2139.56 D3.2 ; U1.47 611.47,1383.05 668.05,1383.05 v1(670,1385) C12.2
LED_RES470: D1.1 R1.2 | length 44
  Top Layer w8: D1.1 R1.2
POWER_LED: D3.1 R12.2 | length 76.8
  Top Layer w10: D3.1 672.8,2210.43 695.59,2233.22 R12.2
STM32_BOOT0: R11.1 U1.60 | length 62.5
  Top Layer w11.81: R11.1 316.1,1542.32 U1.60
STM32_LED: H2.1 R1.1 U1.21 | length 1324.6
  Top Layer w8: U1.21 316.1,965.39 325,956.49 v1(325,950) ; v1(320,680) 320,673.51 328.25,665.25 328.25,653.4 336.06,645.59 R1.1
  Bottom Layer w8: v1(320,680) 291.06,708.94 291.06,854.91 325,888.85 v1(325,950) 325,993 764,1431.99 764,1554 821.32,1611.32 822.5,1611.32 836.18,1625 H2.1
STM32_NRST: C18.1 H1.5 R10.1 S2.1 U1.7 | length 3107.7
  Top Layer w8: v2(92,1255) 62.61,1255 23.32,1215.7 23.32,1052.14 42.3,1033.16 63.7,1033.16 79,1048.45 79,1060.55 94.3,1075.84 115.7,1075.84 189.16,1002.39 189.16,880.84 287,783 287,459.57 C18.1 ; v2@95.01,1258.01 108.37,1258.01 134.79,1284.43 U1.7@158.53,1284.43 ; S2.1@426.81,243.82 C18.1@426.81,319.76 ; S2.1@427.05,243.58 S2.1@682.95,243.58 ; S2.1@670.32,256.22 R10.1@670.32,313.11
  Top Layer w11.81: v2(92,1255) v2@95.01,1258.01 ; U1.7@158.53,1284.43 U1.7 ; C18.1 C18.1@426.81,319.76 ; S2.1@426.81,243.82 S2.1@427.05,243.58 ; R10.1 R10.1@670.32,313.11 ; S2.1@670.32,256.22 S2.1@682.95,243.58
  Bottom Layer w8: v2@89.62,1257.38 89.62,1294.78 75.78,1308.62 38.37,1308.62 13.78,1333.22 13.78,1571.78 253,1811 736,1811 H1.5
  Bottom Layer w11.81: v2@89.62,1257.38 v2(92,1255)
STM32_OSC32_IN: R4.1 U1.3 | length 1246.7
  Top Layer w11.81: v2(49,1379) 53.26,1379 68.99,1363.27 U1.3 ; R4.1 85.87,364.8 85.87,391.87 113,419 v1(159,419)
  Bottom Layer w11.81: v2(49,1379) 86.31,1341.69 89.48,1341.69 122.69,1308.48 122.69,1305.31 170.84,1257.16 170.84,769.23 171.69,768.38 171.69,496.85 159,484.16 v1(159,419)
STM32_OSC32_OUT: R5.1 U1.4 | length 1240.4
  Top Layer w11.81: v2(37.4,1343) 37.89,1343.49 158.53,1343.49 U1.4 ; v1(153,371) 158.46,371 165.53,363.94 R5.1
  Bottom Layer w11.81: v2(37.4,1343) 39.58,1343 57.42,1325.16 82.63,1325.16 106.16,1301.63 106.16,1286.23 108.54,1283.85 108.54,1275.87 130.84,1253.56 130.84,741.35 115,725.51 115,409 v1(153,371)
STM32_OSC_IN: R6.1 U1.5 | length 539.8
  Top Layer w11.81: v2(21.65,1289) 21.65,1291.65 53.9,1323.9 U1.5 ; v1(45,1005) 45,918.94 R6.1
  Bottom Layer w11.81: v2(21.65,1289) 21.65,1028.35 v1(45,1005)
STM32_OSC_OUT: R9.1 U1.6 | length 459
  Top Layer w11.81: v2(66,1285) 85.21,1304.21 U1.6 ; v1(105,1050) 130,1025 R9.1
  Bottom Layer w11.81: v2(66,1285) 65,1284 65,1226.55 75,1216.55 75,1080 v1(105,1050)
STM32_PINA6: H2.2 U1.22 | length 1186.4
  Top Layer w11.81: v1(315,810) 316.55,810 360.84,854.3 360.84,950.7 335.79,975.76 U1.22
  Bottom Layer w8: v1@316.55,810 360.84,854.3 360.84,1010.84 849.99,1499.99 H2.2
  Bottom Layer w11.81: v1(315,810) v1@316.55,810
STM32_PINA7: H2.3 U1.23 | length 1187.5
  Top Layer w11.81: v1(345,765) 345,813 377.38,845.38 377.38,957.55 355.47,979.46 U1.23
  Bottom Layer w8: v1(345,765) 345,813 380,848 380,1010 795,1425 H2.3
STM32_SWCLK: H1.4 U1.49 | length 791.9
  Top Layer w8: U1.49 533.82,1482.56 533.82,1528.82 v2(535,1530)
  Bottom Layer w8: v2(535,1530) 650,1530 909,1789 909,1967 851,2025 H1.4
STM32_SWDIO: H1.2 U1.46 | length 1267.7
  Top Layer w8: v2(580,1505) 603.65,1505 603.83,1505.19 684.19,1505.19 693.94,1495.44 693.94,1375.09 679.91,1361.06 635.3,1361.06 635.09,1361.27 613.38,1361.27 U1.46
  Bottom Layer w8: v2(580,1505) 603.65,1505 603.83,1505.19 653.54,1505.19 928.72,1780.37 928.72,2146.28 H1.2
STM32_SWO: H1.6 U1.55 | length 651.1
  Top Layer w8: U1.55 414.76,1481.61 414.76,1529.76 v2(415,1530)
  Bottom Layer w8: v2(415,1530) 504.29,1530 530.79,1556.5 658.5,1556.5 849.99,1747.99 H1.6
STM32_UART_RX: H3.4 U1.17 | length 696.3
  Top Layer w8: U1.17 239.36,1030.62 239.36,1055.64 243.78,1060.06 639.94,1060.06 775,925 H3.4
STM32_UART_TX: H3.5 U1.16 | length 936.4
  Top Layer w8: U1.16 176.12,1107.36 210.7,1072.78 677.22,1072.78 684.05,1065.95 787.54,962.46 877.54,962.46 896.88,943.12 896.88,906.88 851.2,861.2 851.2,841.1 H3.5@844.74,834.65
STM32_USER_BUTTON: C1.2 R2.2 S1.2 U1.2 | length 1466.3
  Top Layer w11.81: v2(90,1400) 93.77,1400 110.81,1382.95 U1.2 ; S1.2@427.05,618.58 682.95,618.58 678.98,622.56 678.98,689.45 R2.2 674.02,693.43 625.32,742.13 618.46,742.13 611.57,749.02 C1.2
  Bottom Layer w11.81: v2(90,1400) 187.38,1302.62 187.38,776.08 344.87,618.58 S1.2@427.05,618.58
STM32_VCAP1: C17.2 U1.30 | length 110.4
  Top Layer w11.81: C17.2 437.8,960.43 461.05,983.69 472.07,983.69 493.17,1004.79 493.17,1028.53 U1.30
UB_CAP_RES: C1.1 R3.2 | length 51.9
  Top Layer w11.81: R3.2@506.57,750 C1.1
USB_CC1: R8.1 X1.A5 | length 75.3
  Top Layer w8: X1.A5 400.92,2152.58 400.92,2138.01 422.22,2116.71 422.22,2101.37 431.02,2092.57 R8.1
USB_CC2: R7.1 X1.B5 | length 305.4
  Top Layer w8: R7.1 111.57,2329.02 120.37,2320.22 121.35,2320.22 131.57,2310 290,2310 350.39,2249.61 X1.B5
USB_D_N: RV2.1 U1.44 X1.A7 X1.B7 | length 1530.4
  Top Layer w8: v2(347,2314) 350.74,2310.26 372.74,2310.26 405,2278 405,2244.73 391.08,2230.81 391.08,2218.2 X1.B7 ; v2(350,2110) 350,2113.94 360.24,2124.18 X1.A7 ; v2(355,2075) 360,2075 408.06,2026.94 408.06,1930 ; RV2.1 408.06,1930 ; U1.44 678.9,1323.9 735,1380 735,1500 693.06,1541.94 589.94,1541.94 510,1621.88 510,1762.89 408.06,1864.82 408.06,1930
  Bottom Layer w8: v2(347,2314) 348.5,2312.5 348.5,2111.5 v2(350,2110) 352.5,2107.5 352.5,2077.5 v2(355,2075)
USB_D_P: RV1.1 U1.45 X1.A6 X1.B6 | length 1404.9
  Top Layer w8: v2(345,2040) 347.31,2042.32 367.69,2042.32 396.13,2013.87 396.13,1930 ; RV1.1 396.13,1930 ; X1.B6 370.08,2227.32 375,2232.24 v2(375,2262) ; X1.A6 379.92,2123.37 388,2115.29 v2(388,2110) ; U1.45 681.7,1343.58 723.06,1384.94 723.06,1495 688.06,1530 585,1530 495,1620 495,1760 396.13,1858.87 396.13,1930
  Bottom Layer w8: v2(345,2040) 348.74,2043.74 368.79,2043.74 388,2062.95 v2(388,2110) 388,2115.29 375,2128.29 v2(375,2262)
pads on no net: H3.2 H3.6 U1.8 U1.9 U1.10 U1.11 U1.14 U1.15 U1.20 U1.24 U1.25 U1.26 U1.27 U1.28 U1.29 U1.33 U1.34 U1.35 U1.36 U1.37 U1.38 U1.39 U1.40 U1.41 U1.42 U1.43 U1.50 U1.51 U1.52 U1.53 U1.54 U1.56 U1.57 U1.58 U1.59 U1.61 U1.62 U2.8 X1.A2 X1.A3 X1.A8 X1.A10 X1.A11 X1.B2 X1.B3 X1.B8 X1.B10 X1.B11

## Polygon pours and split planes (outlines as drawn)
+3v3 on Power Layer "Power" (solid, pour order 1): 0,2450 cw(c50,2450) 50,2500 1050,2500 cw(c1047.24,2434.97) 1112.27,2432.21 1112.27,75 cw(c1031.15,81.12) 1025.02,0 50,0 cw(c50,50) 0,50
GND on Ground Layer "GND" (solid, pour order 0): 0,2450 cw(c50,2450) 50,2500 1050,2500 cw(c1047.24,2434.97) 1112.27,2432.21 1112.27,75 cw(c1031.15,81.12) 1025.02,0 50,0 cw(c50,50) 0,50
GND on Bottom Layer "Bottom" (solid, pour order 3): 0,2450 cw(c50,2450) 50,2500 1050,2500 cw(c1050,2450) 1100,2450 1100,50 cw(c1050,50) 1050,0 50,0 cw(c50,50) 0,50
GND on Top Layer "Top" (solid, pour order 2): 0,2450 cw(c50,2450) 50,2500 1050,2500 cw(c1050,2450) 1100,2450 1100,50 cw(c1050,50) 1050,0 50,0 cw(c50,50) 0,50

## Silkscreen, mask and mechanical layers (free items; w line width, h text height)
Top Overlay:
  drawing of 4 lines, arcs and shapes, not listed
  text "STM32" at 507.8,1850.39 h47.24
  text "Template" at 440.83,1786.26 h47.24
  text "PCB" at 556.03,1701.39 h47.24

## Text inside footprints (layer, text, board x,y; h text height)
H1: Top Overlay "SWO" at 922,1810 h30; Top Overlay "NRST" at 922,1910 h30; Top Overlay "SWCLK" at 922,2010 h30; Top Overlay "GND" at 922,2110 h30; Top Overlay "SWDIO" at 922,2210 h30; Top Overlay "+3v3" at 922,2310 h30
H2: Top Overlay "PA7" at 921.99,1410.01 h30; Top Overlay "PA6" at 921.99,1510.01 h30; Top Overlay "PA5" at 921.99,1610.01 h30
H3: Top Overlay "+3v3" at 927,1010 h30; Top Overlay "CTS" at 922,1110 h30; Top Overlay "GND" at 922,1210 h30; Top Overlay "MCU_RX" at 922,912.5 h30; Top Overlay "MCU_TX" at 922,812.5 h30; Top Overlay "RTS" at 922,710 h30
H4: Top Overlay "GND" at 921.99,210.01 h30; Top Overlay "GND" at 921.99,310.01 h30; Top Overlay "+3v3" at 921.99,410.01 h30; Top Overlay "+5V" at 921.99,510.01 h30
U1: Top Overlay "REFDES" at 297.5,1230 h50